# EAGLE board rele (EAGLE 6.1)
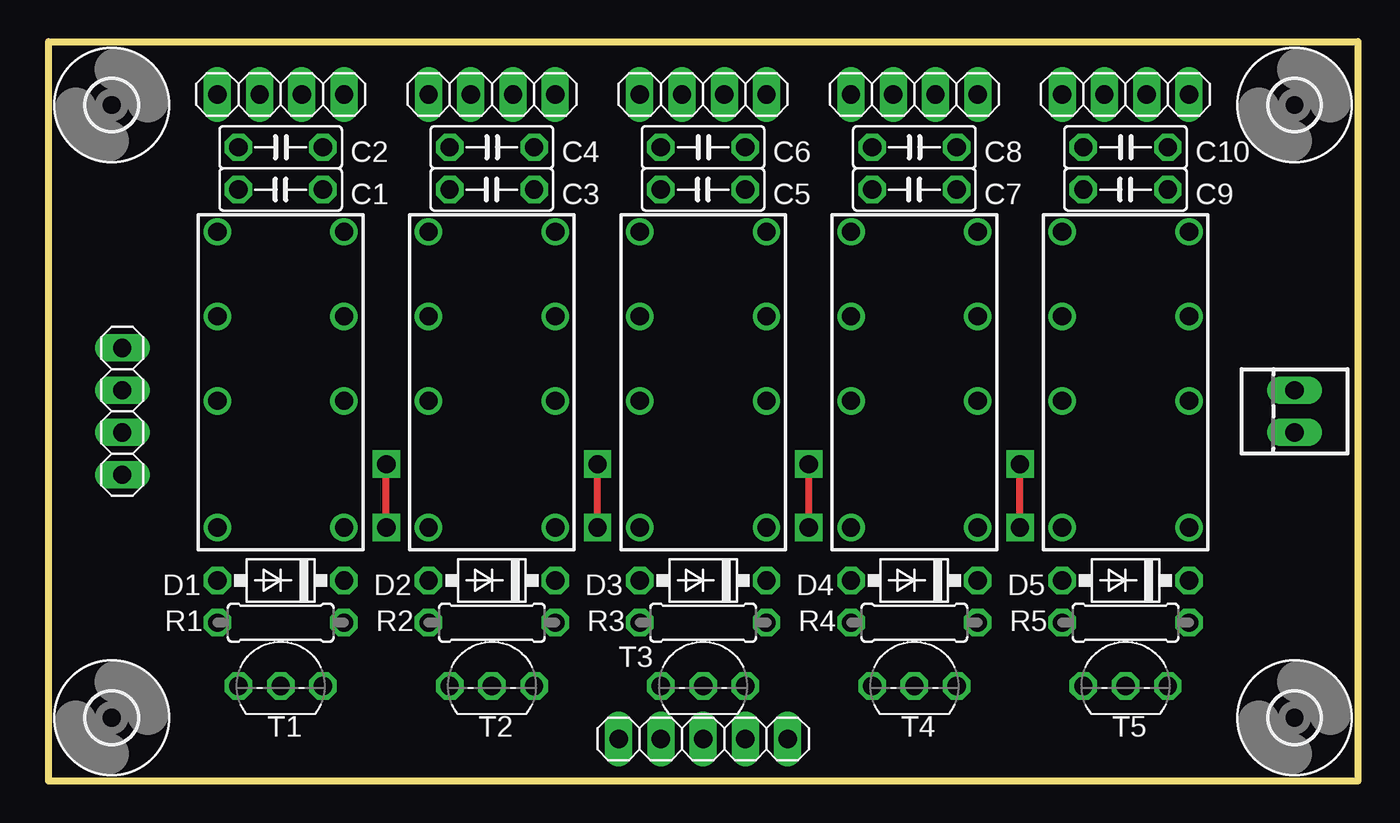
[diagram p0: board, top side]
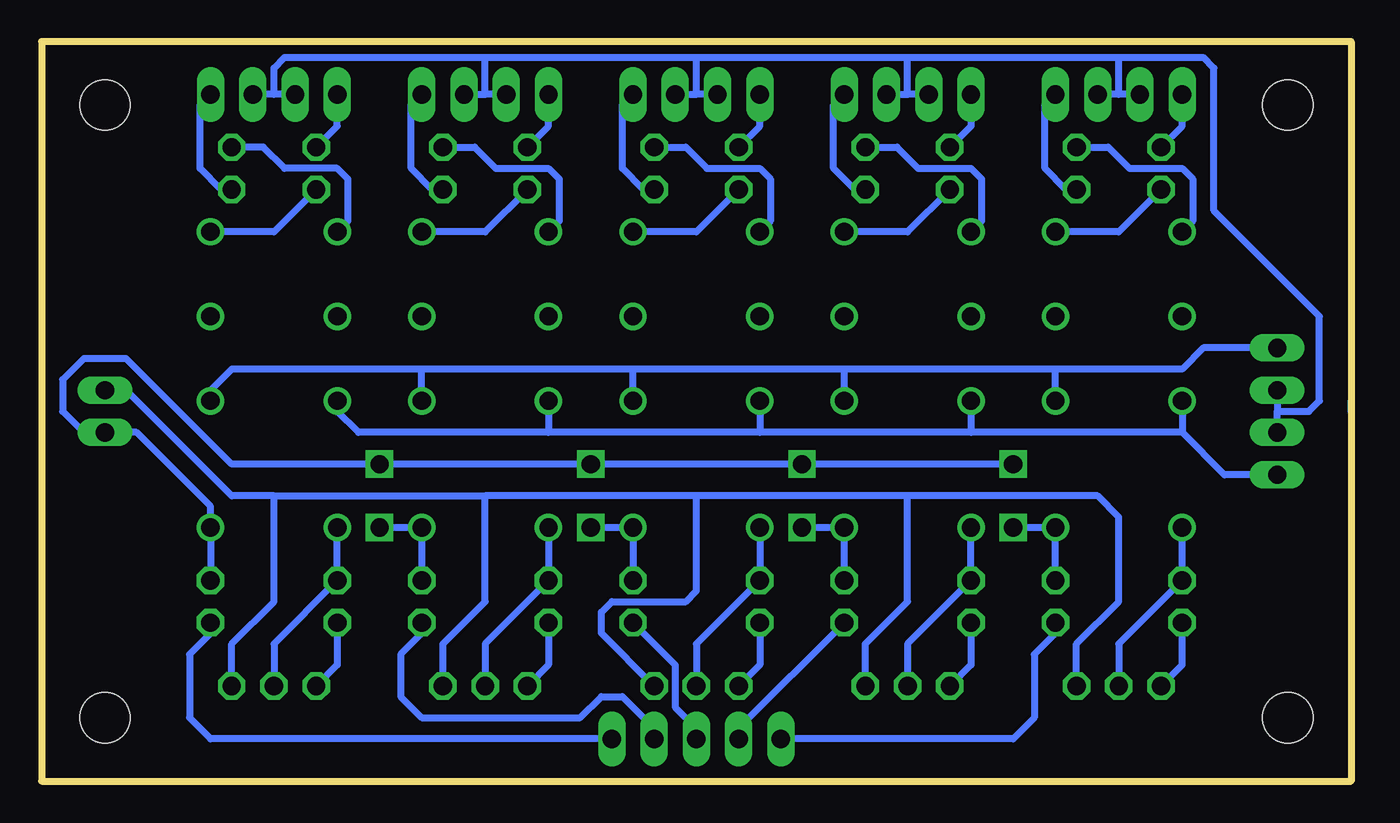
[diagram p1: board, bottom side, seen from below]

Size 78.74 x 44.45 mm. Coordinates in mm from the lower left corner, seen from the top.
Outline: 0,44.45 0,0 78.74,0 78.74,44.45 0,44.45
Copper layers (1*16): Top 0.035mm / dielectric 1.5mm / Bottom 0.035mm
Design rules: minimum track width 10mil, minimum drill 24mil, track to track 8mil, track to pad 8mil, pad to pad 8mil, via to via 8mil, smd to smd 8mil, copper to edge 40mil, drill to drill 8mil, minimum pad ring 10mil, minimum via ring 8mil, stop-mask expansion 4mil, vias tented up to drill 0mil, thermal gap 10mil

## Footprints (pad centres in the part's own frame; a part is rotated, then mirrored left to right if it is on the bottom)
C050-025X075 = drill 1.1 octagon: 1 -2.54,0; 2 2.54,0
DO41-5 = drill 1.1 octagon: A 3.81,0; C -3.81,0
1X02 = drill 1.1 long: 1 -1.27,0; 2 1.27,0
1X05 = drill 1.1 long: 1 -5.08,0; 2 -2.54,0; 3 0,0; 4 2.54,0; 5 5.08,0
MICRO-RELAY = drill 1.1: 11 -1.27,-3.81; 12 3.81,-3.81; 14 8.89,-3.81; 21 -1.27,3.81; 22 3.81,3.81; 24 8.89,3.81; A1 -8.89,-3.81; A2 -8.89,3.81
0207/7 = drill 1.1 octagon: 1 -3.81,0; 2 3.81,0
TO92- = drill 1.1 octagon: 1 2.54,0; 2 0,0; 3 -2.54,0
3,0 = hole 3: 0,0
22-23-2021 = drill 1.1 long: 1 -1.27,0; 2 1.27,0

## Placement (x,y rotation side)
C1  [C050-025X075]  13.97,35.56 180 top
C2  [C050-025X075]  13.97,38.1 0 top
C3  [C050-025X075]  26.67,35.56 180 top
C4  [C050-025X075]  26.67,38.1 0 top
C5  [C050-025X075]  39.37,35.56 180 top
C6  [C050-025X075]  39.37,38.1 0 top
C7  [C050-025X075]  52.07,35.56 180 top
C8  [C050-025X075]  52.07,38.1 0 top
C9  [C050-025X075]  64.77,35.56 180 top
C10  [C050-025X075]  64.77,38.1 0 top
D1  1N4004A  [DO41-5]  13.97,12.06 180 top
D2  1N4004A  [DO41-5]  26.67,12.06 180 top
D3  1N4004A  [DO41-5]  39.37,12.06 180 top
D4  1N4004A  [DO41-5]  52.07,12.06 180 top
D5  1N4004A  [DO41-5]  64.77,12.06 180 top
JP1  [1X02]  4.45,24.77 270 top
JP2  [1X02]  4.45,19.68 90 top
JP3  [1X02]  29.21,41.27 180 top
JP4  [1X02]  16.51,41.27 180 top
JP5  [1X02]  11.43,41.27 0 top
JP6  [1X02]  24.13,41.27 0 top
JP7  [1X02]  41.91,41.27 180 top
JP8  [1X02]  36.83,41.27 0 top
JP9  [1X02]  54.61,41.27 180 top
JP10  [1X02]  49.53,41.27 0 top
JP11  [1X02]  67.31,41.27 180 top
JP12  [1X02]  62.23,41.27 0 top
JP17  [1X05]  39.37,2.54 0 top
K1  MICRO-RELAY  [MICRO-RELAY]  13.97,24.13 90 top
K2  MICRO-RELAY  [MICRO-RELAY]  26.67,24.13 90 top
K3  MICRO-RELAY  [MICRO-RELAY]  39.37,24.13 90 top
K4  MICRO-RELAY  [MICRO-RELAY]  52.07,24.13 90 top
K5  MICRO-RELAY  [MICRO-RELAY]  64.77,24.13 90 top
R1  10k  [0207/7]  13.97,9.53 180 top
R2  10k  [0207/7]  26.67,9.53 180 top
R3  10k  [0207/7]  39.37,9.53 180 top
R4  10k  [0207/7]  52.07,9.53 180 top
R5  10k  [0207/7]  64.77,9.53 180 top
T1  BC547  [TO92-]  13.97,5.71 0 top
T2  BC547  [TO92-]  26.67,5.71 0 top
T3  BC547  [TO92-]  39.37,5.71 0 top
T4  BC547  [TO92-]  52.07,5.71 0 top
T5  BC547  [TO92-]  64.77,5.71 0 top
U$1  [3,0]  3.81,3.81 0 top
U$2  [3,0]  3.81,40.64 0 top
U$3  [3,0]  74.93,40.64 0 top
U$4  [3,0]  74.93,3.81 0 top
X2  22-23-2021  [22-23-2021]  74.93,22.23 90 top

## Library data of the parts
C1-C10 D1-D5 JP1-JP12 JP17 K1-K5 R1-R5 T1-T5 U$1-U$4 X2 = amp

## Nets
+5V: D1.C D2.C D3.C D4.C D5.C K1.A1 K2.A1 K3.A1 K4.A1 K5.A1 X2.1
AGND: JP1.2 JP2.2 JP3.2 JP4.2 JP5.2 JP6.2 JP7.2 JP8.2 JP9.2 JP10.2 JP11.2 JP12.2
GND: T1.1 T2.1 T3.1 T4.1 T5.1 X2.2
IN1_L: C1.1 JP4.1
IN1_R: C2.1 JP5.1
IN2_L: C3.1 JP3.1
IN2_R: C4.1 JP6.1
IN3_L: C5.1 JP7.1
IN3_R: C6.1 JP8.1
IN4_L: C7.1 JP9.1
IN4_R: C8.1 JP10.1
IN5_L: C9.1 JP11.1
IN5_R: C10.1 JP12.1
N$1: C2.2 K1.24
N$2: C1.2 K1.14
N$3: D1.A K1.A2 T1.2
N$4: R1.2 T1.3
N$5: C3.2 K2.14
N$6: C4.2 K2.24
N$7: C6.2 K3.24
N$8: C5.2 K3.14
N$9: C8.2 K4.24
N$10: C7.2 K4.14
N$11: D2.A K2.A2 T2.2
N$12: D3.A K3.A2 T3.2
N$13: D4.A K4.A2 T4.2
N$14: R2.2 T2.3
N$15: R3.2 T3.3
N$16: R4.2 T4.3
N$17: C10.2 K5.24
N$18: C9.2 K5.14
N$19: D5.A K5.A2 T5.2
N$20: R5.2 T5.3
OUT_L: JP1.1 K1.11 K2.11 K3.11 K4.11 K5.11
OUT_R: JP2.1 K1.21 K2.21 K3.21 K4.21 K5.21
RELE_1: JP17.1 R1.1
RELE_2: JP17.2 R2.1
RELE_3: JP17.3 R3.1
RELE_4: JP17.4 R4.1
RELE_5: JP17.5 R5.1

## Tracks (layer width: path | path; a pad name or v marks a point on that pad's centre or on a via)
+5V  (via drill 1.1)
  Top 0.406: v58.42,15.24 v58.42,19.05 | v33.02,15.24 v33.02,19.05 | v20.32,15.24 v20.32,19.05 | v45.72,15.24 v45.72,19.05
  Bottom 0.406: D1.C K1.A1 v20.32,15.24 | D2.C K2.A1 v33.02,15.24 | D3.C K3.A1 v45.72,15.24 | D4.C K4.A1 v58.42,15.24 | D5.C K5.A1 68.58,16.51 73.03,20.95 X2.1 76.2,20.95 77.47,22.23 77.47,24.13 76.2,25.4 73.66,25.4 67.31,19.05 v58.42,19.05 v45.72,19.05 v33.02,19.05 v20.32,19.05
AGND
  Bottom 0.406: 13.97,41.27 JP4.2 | JP6.2 26.67,41.27 | JP8.2 39.37,41.27 | JP10.2 52.07,41.27 | 64.77,41.27 JP11.2 | JP12.2 64.77,41.27 | 64.77,41.27 64.77,42.86 64.14,43.5 52.07,43.5 | 52.07,43.5 39.37,43.5 | 39.37,43.5 26.67,43.5 | 26.67,43.5 13.97,43.5 | 13.97,43.5 8.89,43.5 8.26,42.86 8.26,34.29 1.91,27.94 1.91,22.86 2.54,22.23 4.45,22.23 | JP5.2 13.97,41.27 | 13.97,41.27 13.97,43.5 | JP3.2 26.67,41.27 | 26.67,41.27 26.67,43.5 | JP7.2 39.37,41.27 | 39.37,41.27 39.37,43.5 | JP9.2 52.07,41.27 | 52.07,41.27 52.07,43.5 | JP2.2 4.45,22.23 | JP1.2 4.45,22.23
GND
  Bottom 0.406: T5.1 67.31,8.26 64.77,10.79 64.77,17.14 | 64.77,17.14 52.07,17.14 | T4.1 54.61,8.26 52.07,10.79 52.07,17.14 | T2.1 29.21,8.26 26.67,10.79 26.67,17.14 | 26.67,17.14 39.37,17.14 | 39.37,17.14 52.07,17.14 | T1.1 16.51,8.26 13.97,10.79 13.97,15.88 15.24,17.14 26.67,17.14 | 64.77,17.14 67.31,17.14 73.66,23.5 X2.2 | T3.1 45.09,8.89 45.09,10.16 44.45,10.79 40.01,10.79 39.37,11.43 39.37,17.14
IN1_L
  Bottom 0.406: C1.1 17.14,35.56 18.41,36.83 18.41,40.64 JP4.1
IN1_R
  Bottom 0.406: C2.1 10.16,39.37 JP5.1
IN2_L
  Bottom 0.406: C3.1 29.84,35.56 31.11,36.83 31.11,40.64 JP3.1
IN2_R
  Bottom 0.406: JP6.1 22.86,39.37 C4.1
IN3_L
  Bottom 0.406: C5.1 42.55,35.56 43.81,36.83 43.81,40.64 JP7.1
IN3_R
  Bottom 0.406: C6.1 35.56,39.37 JP8.1
IN4_L
  Bottom 0.406: C7.1 55.24,35.56 56.52,36.83 56.52,40.64 JP9.1
IN4_R
  Bottom 0.406: C8.1 48.26,39.37 JP10.1
IN5_L
  Bottom 0.406: C9.1 67.94,35.56 69.22,36.83 69.22,40.64 JP11.1
IN5_R
  Bottom 0.406: C10.1 60.96,39.37 JP12.1
N$1
  Bottom 0.406: C2.2 14.61,38.1 13.34,36.83 10.16,36.83 9.53,36.2 9.53,33.66 K1.24
N$2
  Bottom 0.406: C1.2 13.97,33.02 K1.14
N$3
  Bottom 0.406: K1.A2 D1.A 13.97,8.26 T1.2
N$4
  Bottom 0.406: T1.3 10.16,6.99 R1.2
N$5
  Bottom 0.406: C3.2 26.67,33.02 K2.14
N$6
  Bottom 0.406: C4.2 27.3,38.1 26.04,36.83 22.86,36.83 22.23,36.2 22.23,33.66 K2.24
N$7
  Bottom 0.406: C6.2 40.01,38.1 38.73,36.83 35.56,36.83 34.92,36.2 34.92,33.66 K3.24
N$8
  Bottom 0.406: C5.2 39.37,33.02 K3.14
N$9
  Bottom 0.406: C8.2 52.7,38.1 51.44,36.83 48.26,36.83 47.62,36.2 47.62,33.66 K4.24
N$10
  Bottom 0.406: C7.2 52.07,33.02 K4.14
N$11
  Bottom 0.406: K2.A2 D2.A 26.67,8.26 T2.2
N$12
  Bottom 0.406: K3.A2 D3.A 39.37,8.26 T3.2
N$13
  Bottom 0.406: K4.A2 D4.A 52.07,8.26 T4.2
N$14
  Bottom 0.406: R2.2 22.86,6.99 T2.3
N$15
  Bottom 0.406: R3.2 35.56,6.99 T3.3
N$16
  Bottom 0.406: R4.2 48.26,6.99 T4.3
N$17
  Bottom 0.406: K5.24 60.33,33.66 60.33,36.2 60.96,36.83 64.14,36.83 65.41,38.1 C10.2
N$18
  Bottom 0.406: C9.2 64.77,33.02 K5.14
N$19
  Bottom 0.406: K5.A2 D5.A 64.77,8.26 T5.2
N$20
  Bottom 0.406: R5.2 60.96,6.99 T5.3
N$35
  Bottom 0.406: 0,22.23 0,22.86
OUT_L
  Bottom 0.406: JP1.1 8.89,26.04 10.16,24.77 17.78,24.77 | 17.78,24.77 30.48,24.77 | 30.48,24.77 43.18,24.77 | 43.18,24.77 55.88,24.77 | 55.88,24.77 67.31,24.77 68.58,23.5 K5.11 | K4.11 55.88,24.77 | K3.11 43.18,24.77 | K2.11 30.48,24.77 | K1.11 17.78,24.77
OUT_R
  Bottom 0.406: JP2.1 7.62,18.41 10.16,20.95 | 10.16,20.95 22.86,20.95 | 22.86,20.95 35.56,20.95 | 35.56,20.95 48.26,20.95 | 48.26,20.95 59.69,20.95 60.96,22.23 K5.21 | K4.21 48.26,20.95 | K3.21 35.56,20.95 | K2.21 22.86,20.95 | K1.21 10.16,20.95
RELE_1
  Bottom 0.406: R1.1 17.78,8.89 19.05,7.62 19.05,3.81 20.32,2.54 JP17.1
RELE_2
  Bottom 0.406: R2.1 36.83,3.17 JP17.2
RELE_3
  Bottom 0.406: R3.1 40.64,6.99 40.64,4.45 39.37,3.17 JP17.3
RELE_4
  Bottom 0.406: R4.1 55.88,8.89 57.15,7.62 57.15,5.08 55.88,3.81 46.35,3.81 45.09,5.08 43.81,5.08 41.91,3.17 JP17.4
RELE_5
  Bottom 0.406: JP17.5 68.58,2.54 69.85,3.81 69.85,7.62 68.58,8.89 R5.1